# Altium PCB 2016_CNC_v2.PcbDoc
Units mil, origin at the board's own origin, x right, y up, seen from the top; angles counter-clockwise.
Board outline 3952 x 3079 mil, 4 copper layers (1-TOP, 2-SIGNAL, 3-GND, 4-BOT), stack 68 mil thick; 77 components, 67 nets, 325 pads, 72 vias.
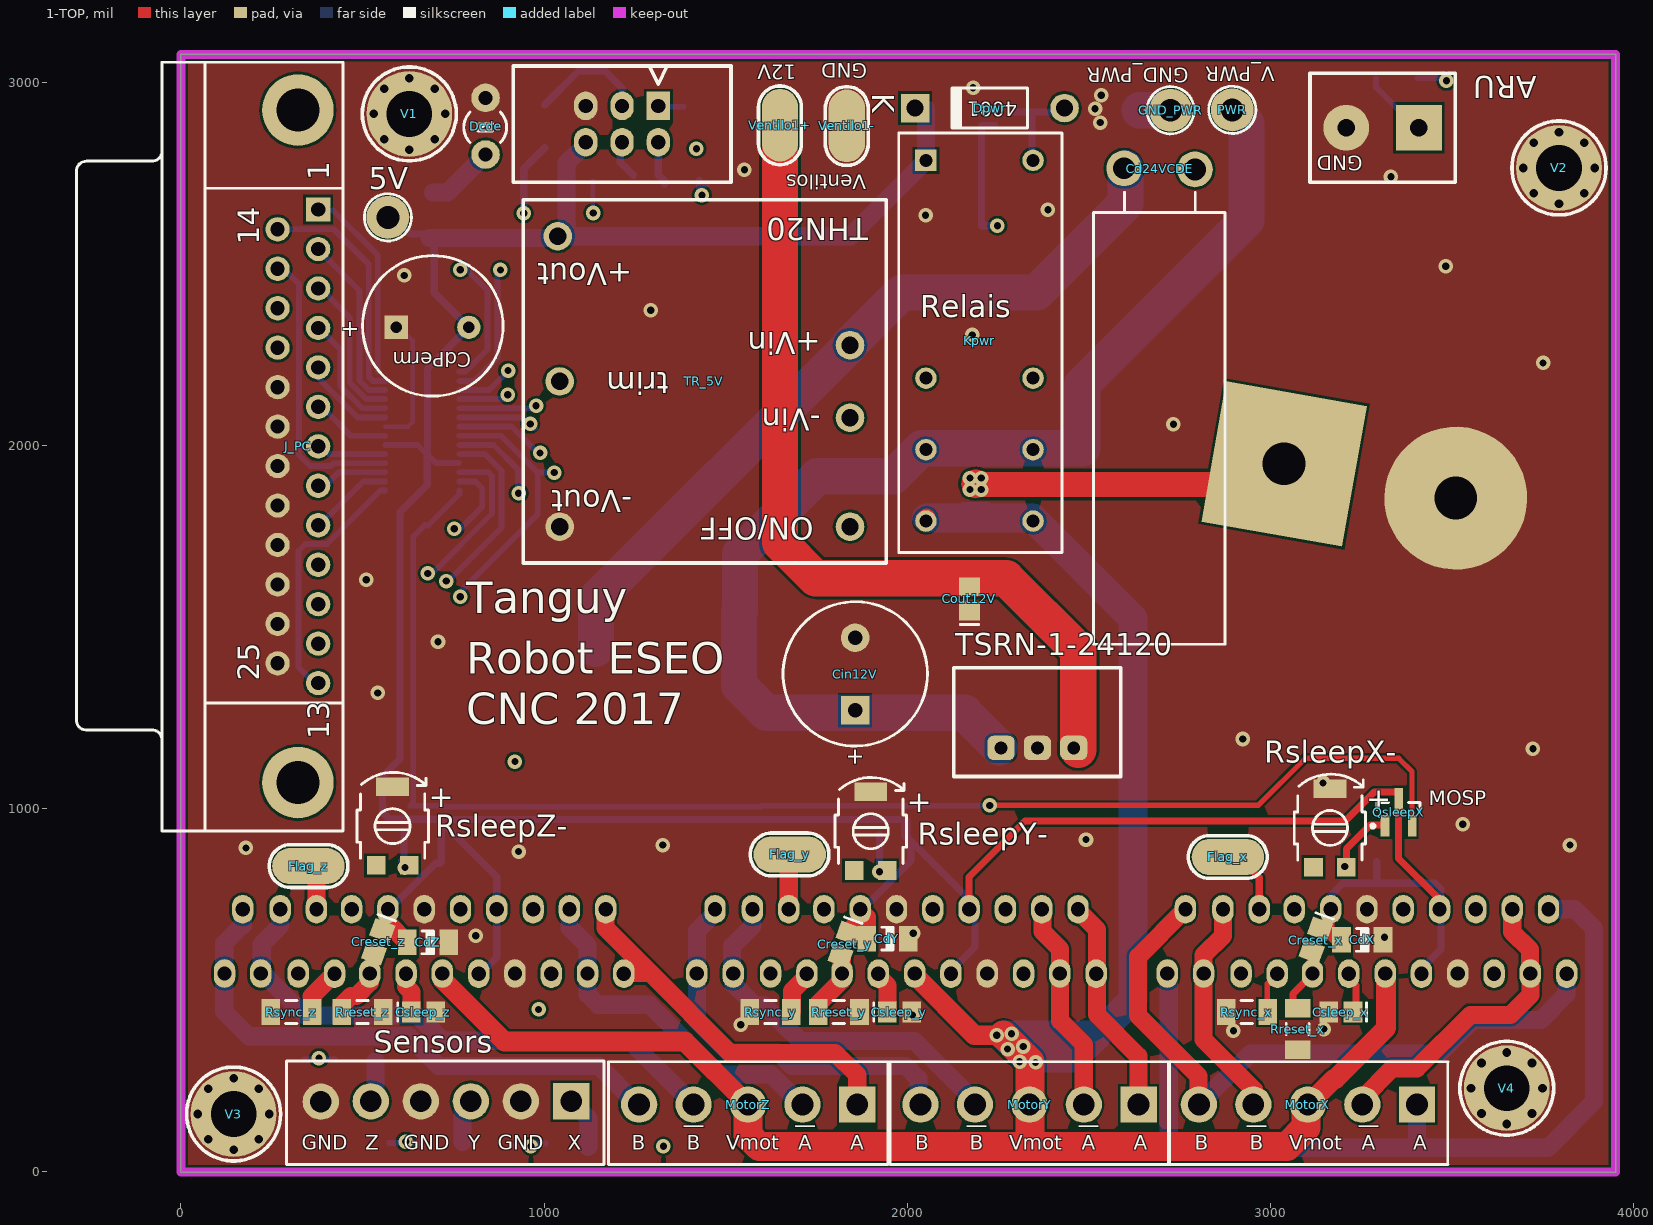
[diagram p0: 1-TOP view]
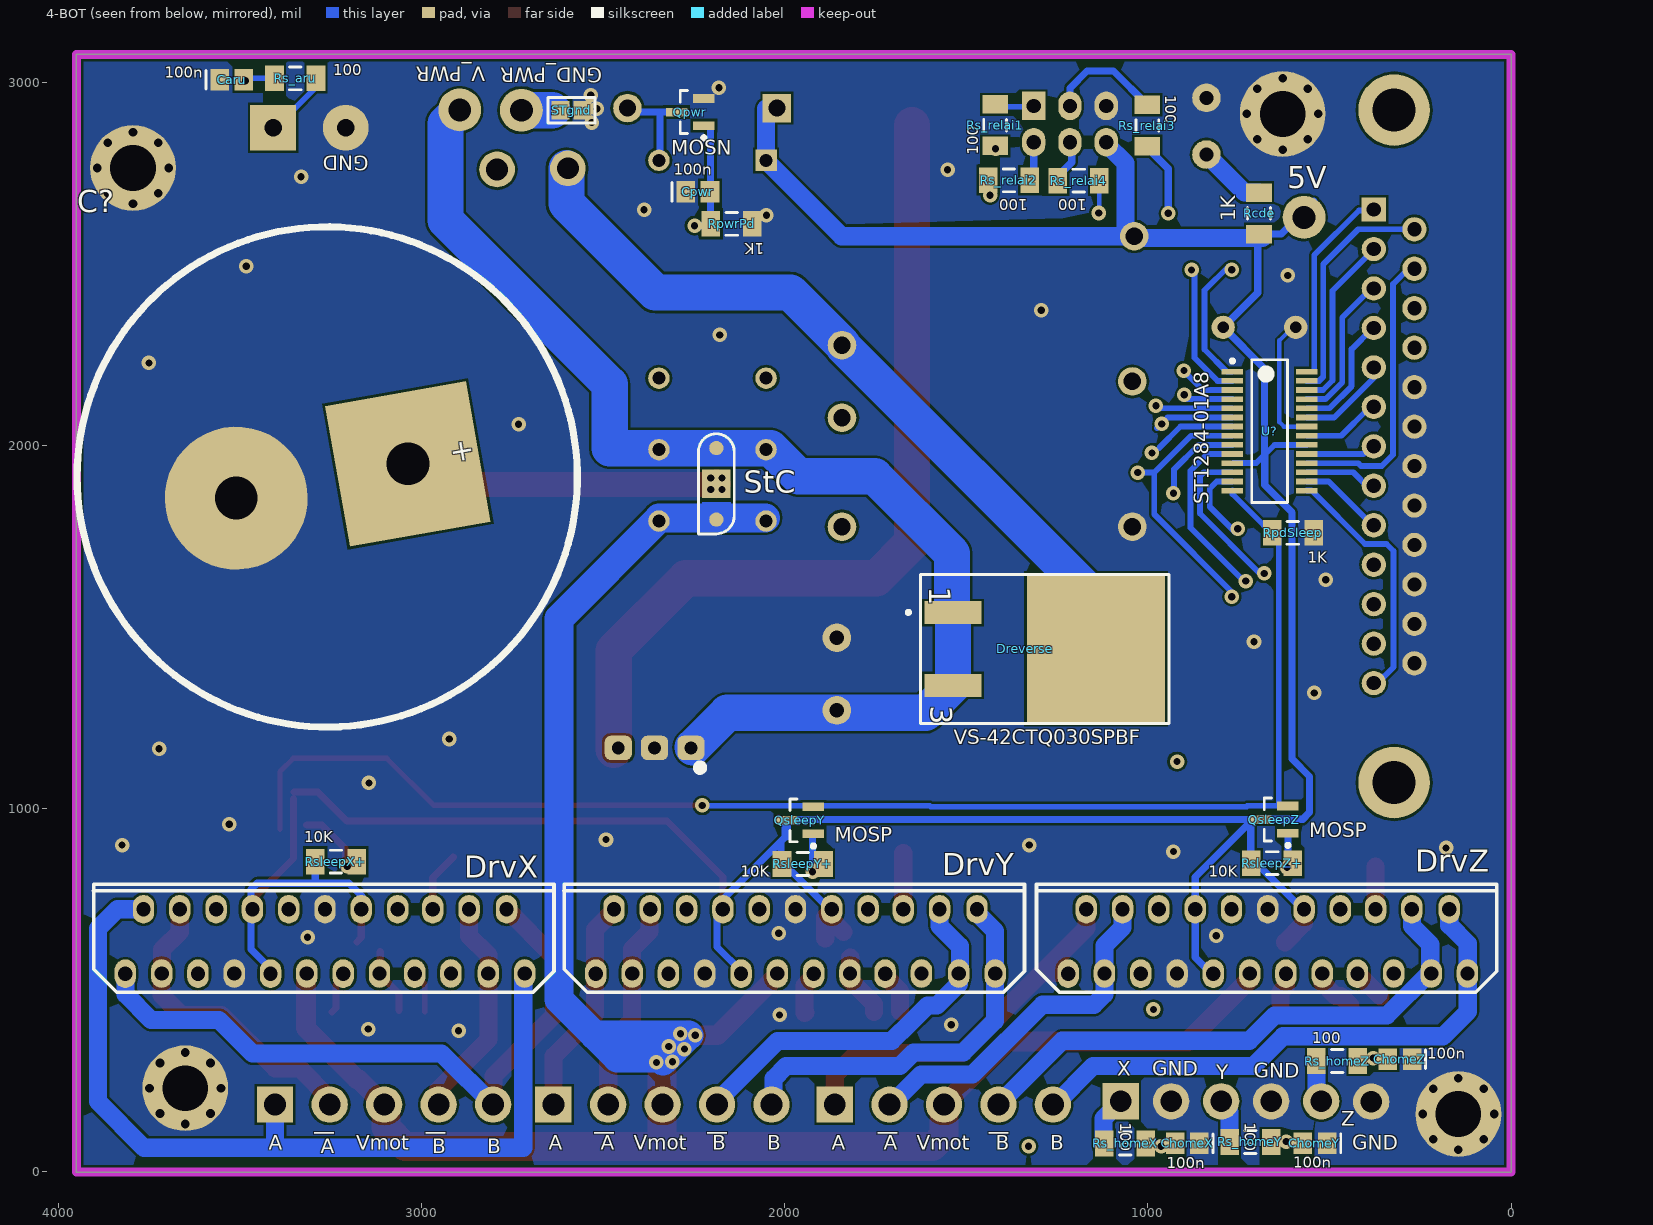
[diagram p1: 4-BOT view, seen from below]
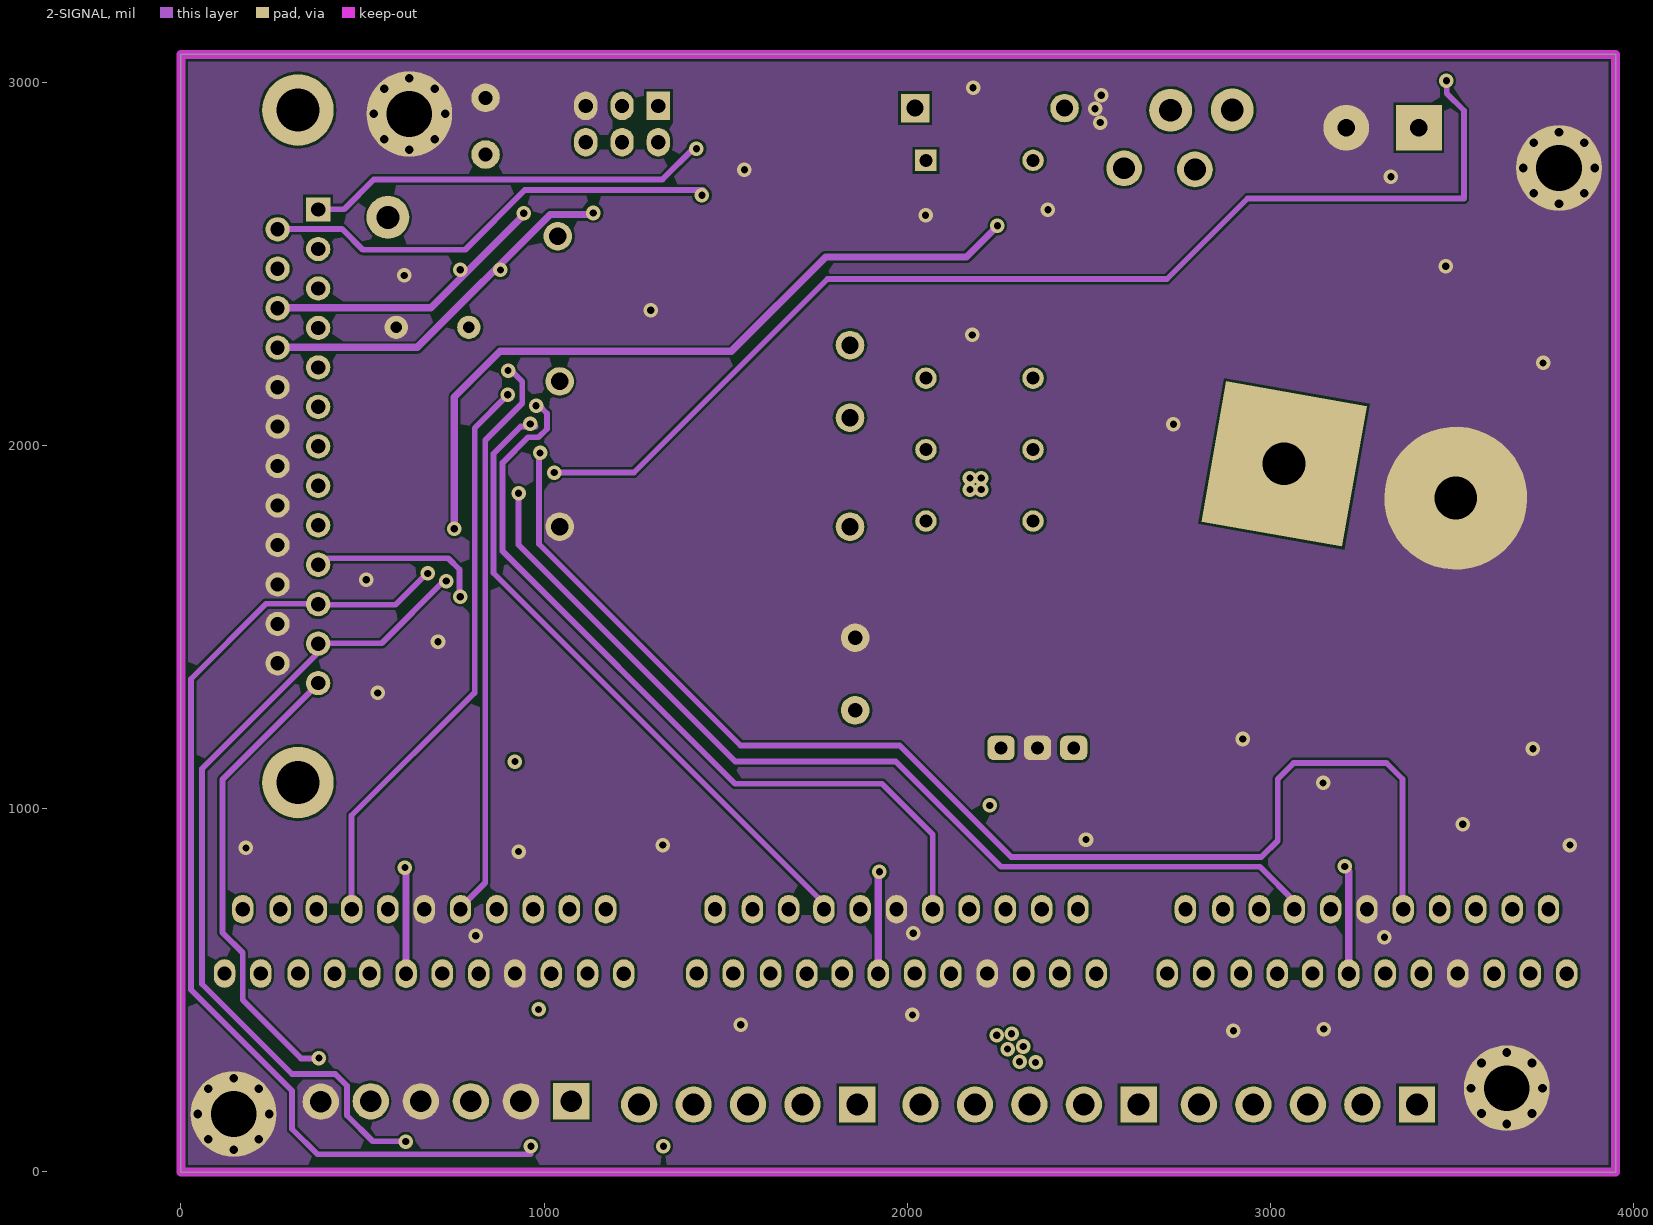
[diagram p2: 2-SIGNAL]
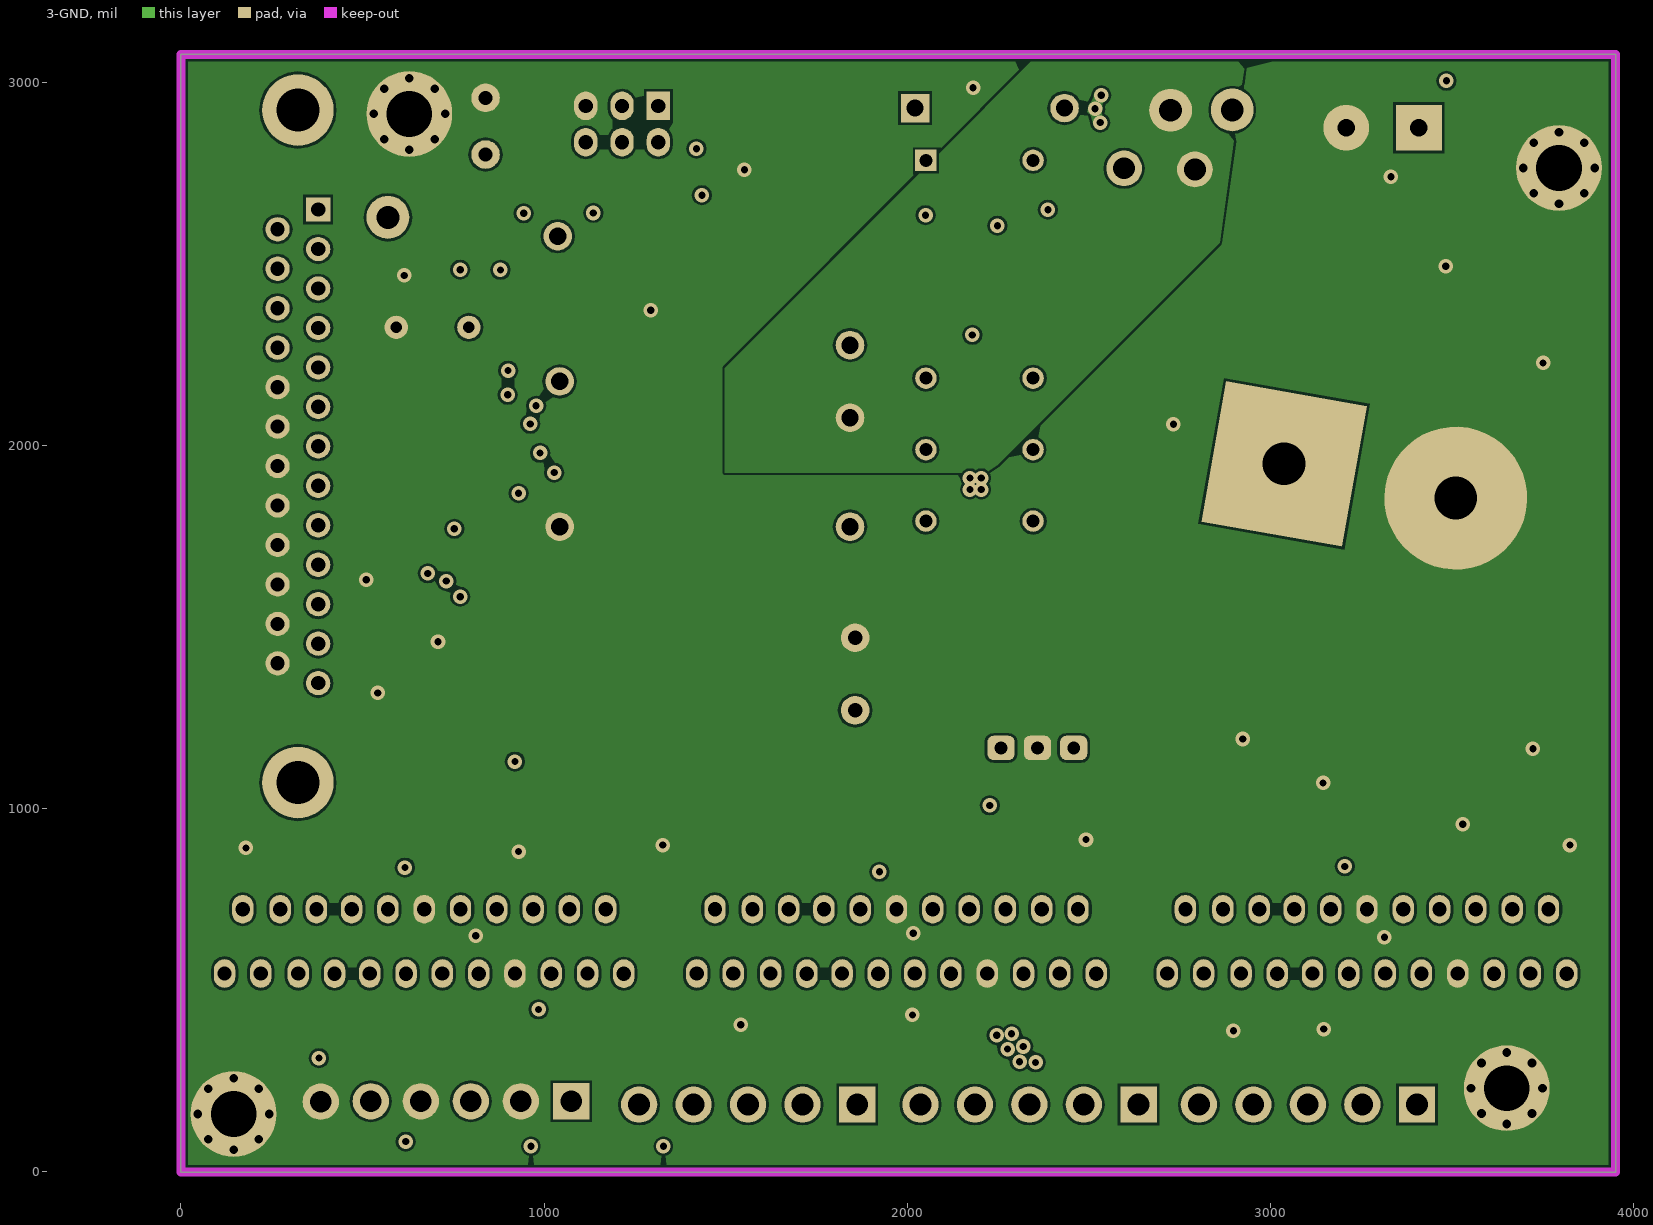
[diagram p3: 3-GND]
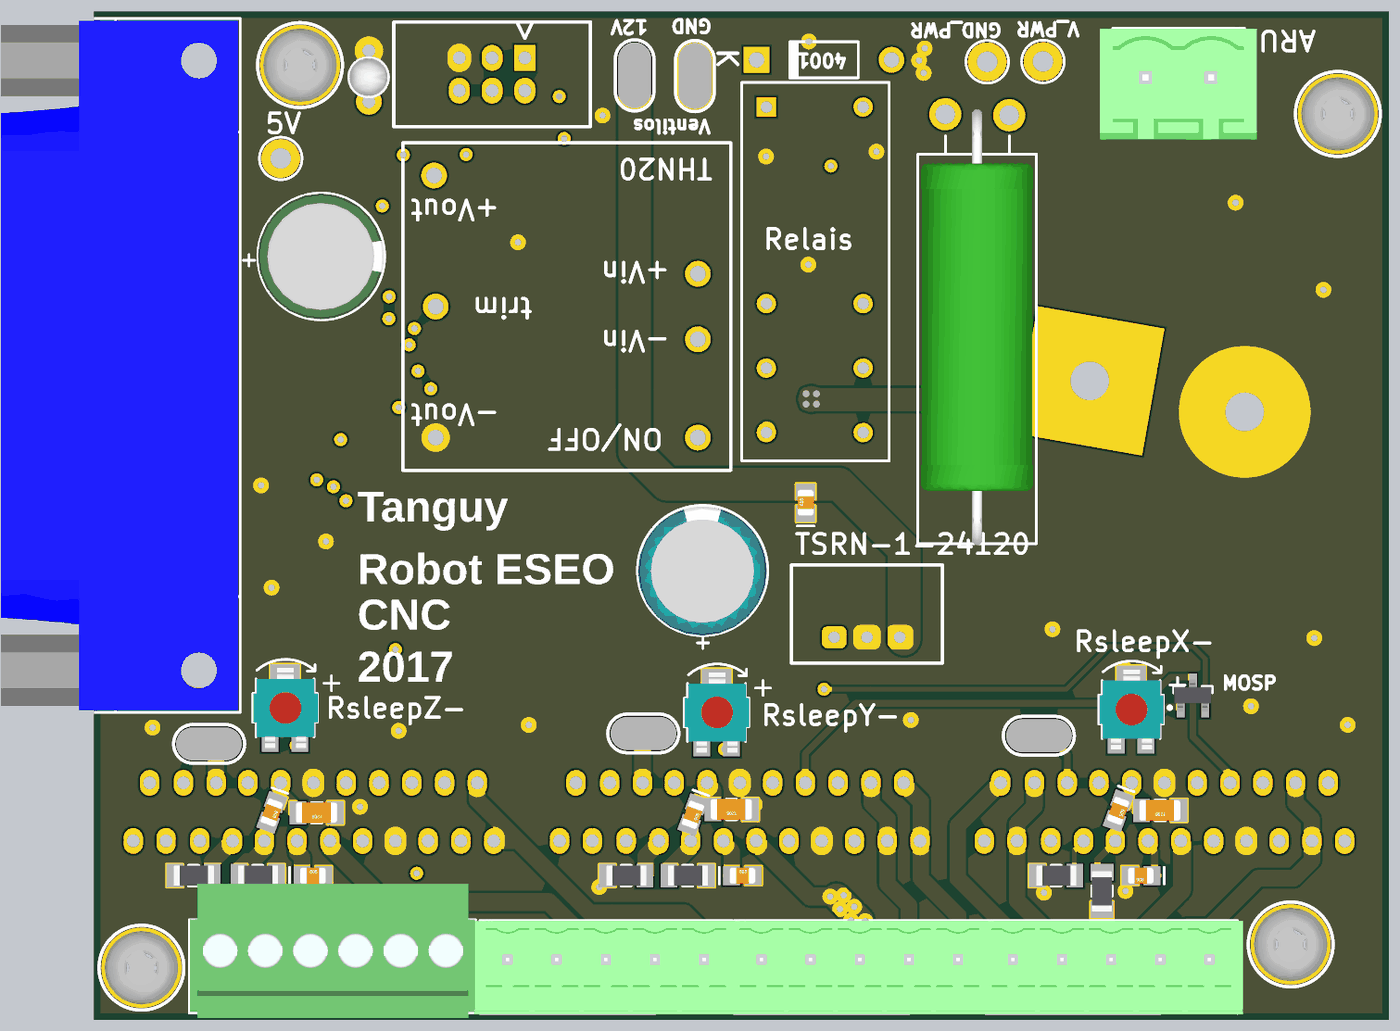
[diagram p4: 3D render of the assembled board from above, using the file's embedded part models]
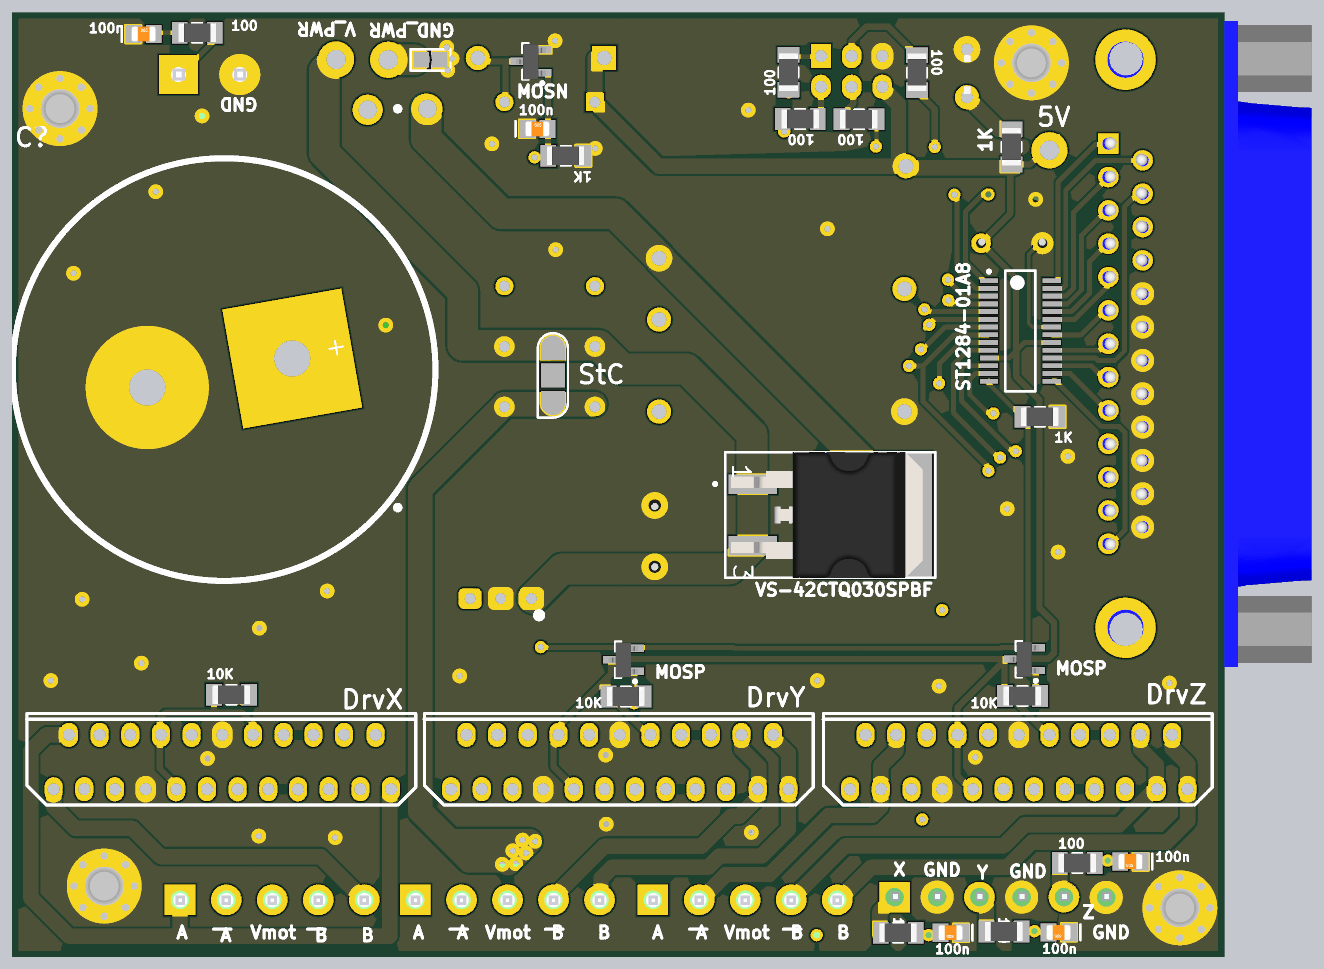
[diagram p5: 3D render of the assembled board from below, using the file's embedded part models]

## Layer stack, top to bottom
Top Solder: solder mask 0.4, Solder Resist, Dk 3.5
1-TOP: signal copper 1.4
Dielectric1: core 20.8, FR-4, Dk 4.8
2-SIGNAL: signal copper 1.4
Dielectric2: prepreg 20.8, FR-4, Dk 4.8
3-GND: signal copper 1.4
Dielectric3: core 20.8, FR-4, Dk 4.8
4-BOT: signal copper 1.4
Bottom Solder: solder mask 0.4, Solder Resist, Dk 3.5

## Board outline
0,-1 0,3078 3952,3078 3952,-1

## Design rules (kind name [scope] priority, off if disabled: settings)
Clearance Clearance_1 [InNamedPolygon('2-GND') Or  InNamedPolygon('3-GND') Or  InNamedPolygon('1-GND') Or  InNamedPolygon('4-GND')] p1: gap=10
Clearance [All] p2: gap=7
FabricationTestpoint [(IsPad And (OnTopLayer Or OnBottomLayer))] p1: side=3 testpointundercomponent=TRUE minsize=40 maxsize=100 preferedsize=60 minholesize=0 maxholesize=40 preferedholesize=32 testpointgrid=1 allowsidetop=TRUE allowsidebottom=TRUE usegrid=TRUE gridtolerance=0.01
HoleSize [All] p1: absolutevalues=TRUE maxlimit=200 minlimit=1 maxpercent=80.000 minpercent=20.000
PlaneConnect [All] p1: planeconnectstyle=Direct reliefexpansion=20 reliefentries=4 reliefconductorwidth=10 reliefairgap=10
PolygonConnect [All] p1: connectstyle=Direct reliefconductorwidth=10 reliefentries=4 polygonreliefangle="90 Angle" airgapwidth=10
RoomDefinition 2016_CNC_v2 [InComponentClass('2016_CNC_v2')] p1: confinementstyle=ConfineIn formatcopy=TRUE lockcomponents=FALSE outline -7875,-7875 -5875,-7875 -5875,-6875 -7875,-6875
RoutingVias [All] p1: holewidth=28 width=50 viastyle="Through Hole" minholewidth=28 minwidth=50 maxholewidth=28 maxwidth=50
SilkToSolderMaskClearance SilkscreenOverComponentPads [IsPad] p1: minsilkscreentomaskgap=10 clearancetoexposedcopper=TRUE
SolderMaskExpansion [All] p1: expansion=4
Width [All] p1: maxlimit=300 minlimit=10 preferedwidth=20
25 further rules are at their usual default settings.

## Components (designator, comment, footprint, x,y, rotation, side; value= is the part's Value field where it differs from the comment)
5V "Name" "Point Test_D3_P1.6mm" 570,2629 r270 top
ARU "BORNIER2" BORNIER2 3210,2876 r0 top
C? "22000uF/ 50V" CAPPR7.5-18X40 3261,1914 r350 bottom
Caru "100n" C0805_N 3524,3008 r180 bottom
Cd24VCDE "1000uF" RESISTANCE_5W 2699,2768 r270 top
CdPerm "100uF" CONDENSATEUR_POLARISE_ELECTROLYTIQUE_RADIAL_5.08/8.9 593,2326 r0 top
CdX "10µ / 25V" C1206_N 3254,639 r180 top
CdY "10µ / 25V" C1206_N 1946,642 r180 top
CdZ "10µ / 25V" C1206_N 680,632 r180 top
ChomeX "100n" C0805_N 892,78 r0 bottom
ChomeY "100n" C0805_N 540,79 r0 bottom
ChomeZ "100n" C0805_N 306,310 r0 bottom
Cin12V "47µ / 63V" CONDENSATEUR_POLARISE_ELECTROLYTIQUE_RADIAL_5.08/10.16 1857,1271 r90 top
Cout12V "10µF/25V" C0805_N 2172,1578 r90 top
Cpwr "100n" C0805_N 2240,2699 r180 bottom
Creset_x "10n" C0805_N 3126,638 r250 top
Creset_y "10n" C0805_N 1828,626 r250 top
Creset_z "10n" C0805_N 543,633 r250 top
Csleep_x "CMS_0805" C0805_N 3195,440 r180 top
Csleep_y "CMS_0805" C0805_N 1979,440 r0 top
Csleep_z "CMS_0805" C0805_N 668,440 r0 top
Dcde "LED" LED_3mm 838,2877 r0 top
Dpwr "Diode 1N4001" DO-41 2228,2930 r180 top
Dreverse "VS-42CTQ030SPBF" "D2Pak (123)" 1537,1540 r270 bottom
DrvX "SLA7078" SLA23 3817,545.98 r180 bottom
DrvY "SLA7078" SLA23 2521,545.98 r180 bottom
DrvZ "SLA7078" SLA23 1220,545.98 r180 bottom
Flag_x "Pad_CMS" PAD_CMS_5.08x2.54 2884,867 r180 top
Flag_y "Pad_CMS" PAD_CMS_5.08x2.54 1677,874 r180 top
Flag_z "Pad_CMS" PAD_CMS_5.08x2.54 351,842 r0 top
GND_PWR "Name" "Point Test_D3_P1.6mm" 2726,2924 r0 top
J_PC "SUBD25_MALE_COUDE" SUBD25_M_C 322,1072 r90 top
Kpwr "Relay-SPST_2pins_par_sorties" RELAY_TECONNECTIVITY 2052,2786 r270 top
MotorX "BORNIER_5V_3.81MM" BORNIER_5V_3.81MM 3404,185 r180 top
MotorY "BORNIER_5V_3.81MM" BORNIER_5V_3.81MM 2637,185 r180 top
MotorZ "BORNIER_5V_3.81MM" BORNIER_5V_3.81MM 1862,185 r180 top
PWR "Name" "Point Test_D3_P1.6mm" 2896,2925 r270 top
Qpwr "MOSN" SOT23-3N 2261,2919 r0 bottom
QsleepX "MOSP" SOT23-3N 3354,990 r90 top
QsleepY "MOSP" SOT23-3N 1959,968 r0 bottom
QsleepZ "MOSP" SOT23-3N 652,970 r0 bottom
Rcde "1k" R1206_N 694,2640 r90 bottom
Relais "BARRETTE_6 CONTACTS_1 RANGEE_MALE_DROITE" "HE10/6_MAL_DROIT_BAS PROFIL" 1315,2836 r180 top
RpdSleep "RESISTANCE_CMS_1206" R1206_N 601,1760 r0 bottom
RpwrPd "RESISTANCE_CMS_1206" R1206_N 2147,2611 r0 bottom
Rreset_x "RESISTANCE_CMS_1206" R1206_N 3076,393 r270 top
Rreset_y "RESISTANCE_CMS_1206" R1206_N 1812,440 r0 top
Rreset_z "RESISTANCE_CMS_1206" R1206_N 500,440 r0 top
Rs_aru "RESISTANCE_CMS_1206" R1206_N 3349,3012 r180 bottom
Rs_homeX "RESISTANCE_CMS_1206" R1206_N 1063,78 r0 bottom
Rs_homeY "RESISTANCE_CMS_1206" R1206_N 718,82 r0 bottom
Rs_homeZ "RESISTANCE_CMS_1206" R1206_N 479,305 r0 bottom
Rs_relai1 "RESISTANCE_CMS_1206" R1206_N 1421,2883 r90 bottom
Rs_relai2 "RESISTANCE_CMS_1206" R1206_N 1383,2731 r180 bottom
Rs_relai3 "RESISTANCE_CMS_1206" R1206_N 1002,2882 r90 bottom
Rs_relai4 "RESISTANCE_CMS_1206" R1206_N 1191,2730 r0 bottom
RsleepX+ "RESISTANCE_CMS_1206" R1206_N 3237,854 r0 bottom
RsleepX- "1k" "POT_3150W_CMS a modifier" 3165,947 r0 top
RsleepY+ "RESISTANCE_CMS_1206" R1206_N 1951,848 r0 bottom
RsleepY- "1k" "POT_3150W_CMS a modifier" 1900,938 r0 top
RsleepZ+ "RESISTANCE_CMS_1206" R1206_N 658,850 r0 bottom
RsleepZ- "1k" "POT_3150W_CMS a modifier" 583,952 r0 top
Rsync_x "RESISTANCE_CMS_1206" R1206_N 2936,440 r0 top
Rsync_y "RESISTANCE_CMS_1206" R1206_N 1624,440 r0 top
Rsync_z "RESISTANCE_CMS_1206" R1206_N 304,440 r0 top
Sensors "BORNIER_6V_3.5MM" BORNIER_6V_3.5MM 1074,194 r180 top
StC "Goutte Strap_3" "Goutte Strap_3 PADS" 2189,1895 r90 bottom
STgnd "Goutte Strap_2" "Goutte Strap_2 Pads_Clearance 0.254mm" 2618,2924 r180 bottom
TR_5V "TRACO THN 20-4811Wi" TRACO_THN20 1943,1677 r180 top
TSRN-1-24120 "DC/DC12V/1A" CONVERTISSEUR_DC/DC_TSRN-1 2589,1388 r180 top
U? "ST1284-01A8" QSOP28 665,2040 r180 bottom
V1 "Pad_M3" M3x6mm 629,2914 r270 top
V2 "Pad_M3" M3x6mm 3796,2765 r270 top
V3 "Pad_M3" M3x6mm 145,159 r270 top
V4 "Pad_M3" M3x6mm 3652,230 r270 top
Ventilo1+ "Pad_CMS" PAD_CMS_5.08x2.54 1650,2883 r270 top
Ventilo1- "Pad_CMS" PAD_CMS_5.08x2.54 1834,2881 r270 top

## Footprints (in the part's own frame and the unit in brackets; to place one, negate y for a bottom-side part, rotate by r counter-clockwise, add the part's x,y. Pads: shape width x height; smd on the part's side, far side on the other; paste and mask are expansions set on the pad)
BORNIER2 [mm] "Connector; Header; 2 Position; screw terminal blocks, Pin Spacing=5.08mm"
  rect 3.2x3.2 hole 1.219: 1(5.08,0)
  round 3.2 hole 1.219: 2(0,0)
  silkscreen extent -2.54,-3.81 7.62,3.81, body extent -3.57,-4.8 8.59,3.8, height 12
BORNIER_5V_3.81MM [mil]
  rect 100x100 hole 60: 1(-1,0)
  round 100 hole 60: 2(150,0) 3(300,0) 4(450,0) 5(600,0)
  silkscreen extent -86,-118 684,166, body extent -102,-117 702,168, height 363
BORNIER_6V_3.5MM [mil]
  rect 100x100 hole 60: 1(-1,0)
  round 100 hole 60: 2(137.8,0) 3(275.59,0) 4(413.39,0) 5(551.18,0) 6(688.98,1)
  silkscreen extent -91,-111 783,174, body extent -89,-221 781,188, height 859
C0805_N [mm] "Chip Capacitor, Body 2.0x1.3mm, IPC Medium Density"
  rect 1.3x1.5 smd: 1(-0.85,0) 2(0.85,0)
  silkscreen extent -1.8,-0.65 -1.8,0.65, body extent -0.99,-0.63 1.01,0.63, height 0.8
C1206_N [mm] "Chip Capacitor, Body 3.2x1.6mm, IPC Medium Density"
  rect 1.3x1.8 smd: 1(-1.45,0) 2(1.45,0)
  silkscreen extent -0.4,-0.8 0.4,0.8, body extent -1.57,-0.81 1.63,0.79, height 1.02
CAPPR7.5-18X40 [mm] "Capacitor, Electrolytic, Radial; Body 18 x 40 mm (Dia.xH typ); Pin Spacing 7.5 mm (typ)"
  rect 10x10 hole 3: 1(-5.715,0.076)
  round 10 hole 3: 2(6.528,0.356)
  silkscreen extent -17.5,-17.5 17.5,17.5, body extent -9.01,-9.01 9.01,9.01, height 40
CONDENSATEUR_POLARISE_ELECTROLYTIQUE_RADIAL_5.08/8.9 [mil] "CONDENSATEUR_POLARISE_ELECTROLYTIQUE_RADIAL ; DIAMETRE : 8.9mm ; ESPACEMENT BROCHES : 5.08mm"
  rect 64x64 / inner round 64 / far side round 64 hole 32: 1(0,0)
  round 64 hole 32: 2(200,0)
  silkscreen extent -93,-190 294,197, body extent -93,-188 291,196, height 485
CONDENSATEUR_POLARISE_ELECTROLYTIQUE_RADIAL_5.08/10.16 [mil] "CONDENSATEUR POLARISE ELECTROLYTIQUE RADIAL ; DIAMETRE : 10.16mm ; ESPACEMENT BROCHES : 5.08mm"
  rect 79x79 / inner round 79 / far side round 79 hole 40: 1(0,0)
  round 79 hole 40: 2(200,0)
  silkscreen extent -98,-199 299,198, body extent -98,-197 295,197, height 630
CONVERTISSEUR_DC/DC_TSRN-1 [mm] "CONVERTISSEUR_DC/DC_TSRN-1"
  rrect50% 1.9x1.7 hole 0.9: 1(8.38,5.6) 2(5.84,5.6) 3(3.3,5.6)
  silkscreen extent 0,0 11.7,7.6
"D2Pak (123)" [mm] "D2-PAK; 3 Leads (1 Cropped); Body 15.2 (inc. leads) x 10.9 mm (LxW max)"
  rect 1.61x4 smd: 1(0,0) 3(5.08,0)
  rect 10.49x9.68 smd: 2(2.54,10)
  silkscreen extent -2.67,-3.25 7.75,15.11, body extent -2.66,-1.8 7.74,14.05, height 4.6
DO-41 [mm] "Diode, Axial; Body 5.2 x 2.7 mm (LxDia. max), Lead Dia. 0.86 mm (max)"
  round 2 hole 1.2: 1(-5.23,0)
  rect 2x2 hole 1.2: 2(5.23,0)
  silkscreen extent -2.65,-1.4 2.75,1.4
"Goutte Strap_2 Pads_Clearance 0.254mm" [mil] "Goutte Strap_2 Pads_Clearance 0.254mm"
  rect 50x50 smd mask+7.87: 1(0,0) 2(60,0)
  silkscreen extent -35,-35 95,35
"Goutte Strap_3 PADS" [mm] "3 Pads CMS Goutte Strap"
  round 1 smd: 1(-2.5,0) 3(2.5,0)
  rect 2x2 smd: 2(0,0)
  1-TOP region: 1.289,1 2.289,1 2.672,0.924 2.996,0.707 3.213,0.383 3.289,0 3.289,0 3.213,-0.383 2.996,-0.707 2.672,-0.924 2.289,-1 2.289,-1 1.289,-1
  1-TOP region: -1.286,-1 -2.286,-1 -2.669,-0.924 -2.993,-0.707 -3.21,-0.383 -3.286,0 -3.286,0 -3.21,0.383 -2.993,0.707 -2.669,0.924 -2.286,1 -2.286,1 -1.286,1
  4-BOT region: 0,1 0.383,0.924 0.707,0.707 0.924,0.383 1,0 1,0 0.924,-0.383 0.707,-0.707 0.383,-0.924 0,-1 0,-1 -0.383,-0.924 -0.707,-0.707 -0.924,-0.383 -1,0 -1,0 -0.924,0.383 -0.707,0.707 -0.383,0.924 0,1
  silkscreen extent -3.5,-1.25 3.5,1.25
"HE10/6_MAL_DROIT_BAS PROFIL" [mm] "Connector; HE10; 6 Position; Male; Right Low Profile; Pin Spacing=2.54mm"
  rect 1.63x2 hole 1: 1(0,-2.54)
  oval 1.63x2 hole 1: 2(0,0) 3(2.54,-2.54) 4(2.54,0) 5(5.08,-2.54) 6(5.08,0)
  silkscreen extent -5.08,-5.33 10.16,2.79
LED_3mm [mm] "LED 3mm; 2 Leads"
  round 2 hole 1: 1(0.025,-1.905) 2(0.025,2.057)
  silkscreen extent -1.5,-1.06 1.5,1.06, body extent -1.64,-1.65 1.65,1.65, height 5.51
M3x6mm [mm] "Vis M3 X 6mm _TORX_Tête 6mm"
  round 0.8 hole 0.6: 1(-2.5,0) 1(-1.768,1.768) 1(-1.768,-1.768) 1(0,2.5) 1(0,-2.5) 1(1.768,1.768) 1(1.768,-1.768) 1(2.5,0)
  round 6 hole 3.2: 1(0,0)
  silkscreen extent -3.28,-3.29 3.28,3.29, body extent -2.84,-2.85 2.86,2.85, height 1.67
PAD_CMS_5.08x2.54 [mil] "Pad pour souder un fil"
  oval 200x100 smd paste+0.2: 1(0,0)
  silkscreen extent -108,-59 109,59, body extent -85,-30 84,30, height 10
"Point Test_D3_P1.6mm" [mm] "Test point for PCB_Hole 1.6mm"
  round 3 hole 1.6: 1(0,0)
  silkscreen extent -1.65,-1.65 1.65,1.65
"POT_3150W_CMS a modifier" [mm] "Trimmer CMS 3150W Tyco"
  rect 1.3x1.3 smd: 1(-1.15,-2.75) 3(1.15,-2.75)
  rect 2.3x1.3 smd: 2(0,2.75)
  silkscreen extent -2.5,-2.25 2.5,3.76, body extent -2.46,-3.1 2.54,3.1, height 2.55
QSOP28 [mm] "SOP, 28-Leads, Body 9,89x3,89mm, Pitch 0,64mm, IPC Medium Density"
  rect 1.5x0.4 smd: 1(-2.6,4.16) 2(-2.6,3.52) 3(-2.6,2.88) 4(-2.6,2.24) 5(-2.6,1.6) 6(-2.6,0.96) 7(-2.6,0.32) 8(-2.6,-0.32) 9(-2.6,-0.96) 10(-2.6,-1.6) 11(-2.6,-2.24) 12(-2.6,-2.88) 13(-2.6,-3.52) 14(-2.6,-4.16) 15(2.6,-4.16) 16(2.6,-3.52) 17(2.6,-2.88) 18(2.6,-2.24) 19(2.6,-1.6) 20(2.6,-0.96) 21(2.6,-0.32) 22(2.6,0.32) 23(2.6,0.96) 24(2.6,1.6) 25(2.6,2.24) 26(2.6,2.88) 27(2.6,3.52) 28(2.6,4.16)
  silkscreen extent -2.73,-5 1.25,5.03, body extent -2,-5 2,5, height 1.75
R1206_N [mm] "Chip Resistor, Body 3.2x1.6mm, IPC Medium Density"
  rect 1.3x1.8 smd: 1(-1.45,0) 2(1.45,0)
  silkscreen extent -0.4,-0.8 0.4,0.8, body extent -1.68,-0.87 1.68,0.87, height 0.71
RELAY_TECONNECTIVITY [mm] "OZ-SS-105LM1,200"
  rect 1.5x1.5 hole 0.9: 1(0,0)
  round 1.5 hole 0.9: 2(15.24,0) 3(20.24,0) 4(25.24,0) 5(25.24,7.5) 6(20.24,7.5) 7(15.24,7.5) 8(0,7.5)
  silkscreen extent -1.91,-1.91 27.43,9.53
RESISTANCE_5W [mil] "RESISTANCE 5W ; DIAMETRE : 8.5mm ; LONGUEUR : 26mm ; PAS : 2mm"
  round 98.43 hole 60: 1(7,94) 2(4,-101)
  silkscreen extent 70,-185 1315,177, body extent -12,-175 1320,167, height 368
SLA23 [mm]
  oval 1.5x2 hole 1: 1(0,-0.01) 2(1.27,4.5) 3(2.54,0) 4(3.81,4.5) 5(5.08,-0.01) 6(6.35,4.5) 7(7.62,0) 8(8.89,4.5) 9(10.16,-0.01) 10(11.43,4.5) 11(12.7,0) 12(13.97,4.5) 13(15.24,-0.01) 14(16.51,4.5) 15(17.78,0) 16(19.05,4.5) 17(20.24,-0.01) 18(21.51,4.5) 19(22.78,0) 20(24.05,4.5) 21(25.4,0) 22(26.67,4.5) 23(27.94,0)
  silkscreen extent -2.24,-1.31 29.99,6.25
SOT23-3N [mm] "SOT23, 3-Leads, Body 2.9x1.3mm, Pitch 0.95mm, Lead Span 2.5mm, IPC Medium Density"
  rect 1.5x0.6 smd: 1(-0.95,0.95) 2(-0.95,-0.95) 3(0.95,0)
  silkscreen extent -1.07,-1.5 0.7,1.92, body extent -1.24,-1.5 1.23,1.5, height 1.1
SUBD25_M_C [mm] "SUBD ; 25 CONTACTS ; MALE ; COUDE ; PAS = 2.77 mm / 2.8 mm"
  rect 1.7x1.7 hole 1: 1(40.092,-1.42)
  round 1.7 hole 1: 2(37.331,-1.42) 3(34.57,-1.42) 4(31.809,-1.42) 5(29.048,-1.42) 6(26.287,-1.42) 7(23.526,-1.42) 8(20.765,-1.42) 9(18.004,-1.42) 10(15.243,-1.42) 11(12.482,-1.42) 12(9.721,-1.42) 13(6.96,-1.42) 14(38.711,1.42) 15(35.95,1.42) 16(33.189,1.42) 17(30.428,1.42) 18(27.667,1.42) 19(24.906,1.42) 20(22.145,1.42) 21(19.384,1.42) 22(16.623,1.42) 23(13.862,1.42) 24(11.101,1.42) 25(8.34,1.42)
  round 5 hole 3: FIX1(0,0) FIX2(47.052,0)
  silkscreen extent -3.39,-3.16 50.4,15.5, body extent -3.23,-3 50.23,15.4, height 12.7
TRACO_THN20 [mm] "THN20"
  round 2 hole 1.219: 1(2.54,-15.24) 2(2.54,-10.16) 3(22.987,-22.86) 4(22.86,-12.7) 5(22.86,-2.54) 6(2.54,-2.54)
  silkscreen extent 0,-25.4 25.4,0, body extent -0.06,-25.43 25.41,0, height 9.91

## Part data
5V GND_PWR PWR: library part "Point Test", "Point test"
ARU: "Terminal blocks, 2 pins, pitch=5mm"
C?: library part "Capacitor  Pol_Radial", "Polarized Capacitor"
Caru CdX CdY CdZ ChomeX ChomeY ChomeZ Cpwr Creset_x Creset_y Creset_z Csleep_x Csleep_y Csleep_z: library part CONDENSATEUR_CMS_CER_0805, "CONDENSATEUR CMS CERAMIQUE 0805"
Cd24VCDE CdPerm: library part "Condensateur Polarise Traversant", "Polarized Capacitor"
Cin12V: library part CONDENSATEUR_POL_ELECTROLY_RAD_5.08/10.16, "CONDENSATEUR POLARISE ELECTROLYTIQUE RADIAL 5.08/10.16"
Cout12V: library part Condensateur, "Capacitor"
Dcde: "Typical LED"
Dpwr: "1 Amp General Purpose Rectifier"
Dreverse: library part "Diode Shottky double BAT54C", "DIODE SCHOTTKY DOUBLE"
Flag_x Flag_y Flag_z Ventilo1+ Ventilo1-: "Pad pour souder un fil"
J_PC: "CONNECTEUR SUBD25 MALE COUDE"
Kpwr: "OZ-SS-105LM1,200 - Single-Pole Single-Throw Relay"
Qpwr: library part "Transistor MOSFET-N", "N-Channel MOSFET"
QsleepX QsleepY QsleepZ: library part "Transistor MOSFET-P", "P-Channel MOSFET"
Rcde: library part Resistor, "Resistor"
Relais: "BARRETTE 6 CONTACTS 1 RANGEE MALE DROITE"
RpdSleep RpwrPd Rreset_x Rreset_y Rreset_z Rs_aru Rs_homeX Rs_homeY Rs_homeZ Rs_relai1 Rs_relai2 Rs_relai3 Rs_relai4 RsleepX+ RsleepY+ RsleepZ+ Rsync_x Rsync_y Rsync_z: library part RESISTANCE_CMS_0805, "RESISTANCE CMS 1206"
RsleepX- RsleepY- RsleepZ-: library part "Resistor Ajustable", "Resistor Ajustable"
TR_5V: "Traco 20W 24V to 5V*4A"
TSRN-1-24120: library part CONVERTISSEUR_DC/DC_TSRN-1, "CONVERTISSEUR_DC/DC_TSRN-1-24120"
U?: "Parallel port single termination network with ±15 kV ESD protection"
V1 V2 V3 V4: library part "Vis M3 X 6mm _TORX_Tête 6mm", "Vis M3 X 6mm _TORX_Tête 6mm"

## Via types
v1: diameter 40, hole 20, 1-TOP to 4-BOT, 68 vias
v2: diameter 40, hole 20, 1-TOP to 4-BOT, tented both sides, 4 vias

## Nets (pads, with @x,y where several pads share a name; then routed paths per layer and width w, separated by ;. In a path a pad name is that pad's centre, name@x,y a point inside that pad or via, vN(x,y) a via of type N, cw(c..) or ccw(c..) an arc to the next point about the centre after c; other vN are vias at no path point)
5V: 5V.1 CdPerm.2 CdX.2 CdY.2 CdZ.2 Creset_x.1 Creset_y.1 Creset_z.1 Dpwr.2 DrvX.8 DrvX.9 DrvX.14 DrvY.8 DrvY.9 DrvY.14 DrvZ.8 DrvZ.9 DrvZ.14 Kpwr.1 QsleepX.3 QsleepY.3 QsleepZ.3 Rcde.1 Relais.6 RsleepX+.2 RsleepY+.2 RsleepZ+.2 TR_5V.3 U?.11 U?.20 | length 9788
  1-TOP w20: DrvY.8 2171,812 2325,966 3207,966 3287,1046 QsleepX.3@3352,1046 ; DrvX.14 3167,645 CdX.2@3179,633 ; QsleepX.3 3354,863 DrvX.8@3466,751 ; DrvX.8@3466,754 DrvX.8@3466,751 ; DrvX.8 3466,722.15 DrvX.8@3466,751
  1-TOP w50: DrvZ.14@571,683.91 CdZ.2 ; Creset_y.1@1839,660.7 1879.39,701.09 1888.91,701.09 CdY.2
  4-BOT w16: U?.20 651.8,2002.2 678.5,1975.5 701.99,1952.01 U?.11@764.99,1952.01
  4-BOT w20: 5V.1@543,2673 633.09,2582.91 Rcde.1 ; DrvZ.14@573,722 701,850 RsleepZ+.2 ; 678.5,1975.5 678.5,1891.5 603,1816 603,1137 555,1089 555,990 574,971 QsleepZ.3@689.4,971 ; 679,1981 679,2212 CdPerm.2 698,2421 698,2571.63 Rcde.1@698,2582 ; QsleepZ.3 QsleepZ.3@712,970 ; RsleepZ+.2@717,855 QsleepZ.3@717,965 ; DrvZ.9@818,538 870,590 DrvZ.8 870,812 QsleepZ.3@717,965 ; DrvY.14 1877.15,723.15 2011,857 2011,910 ; 1996.4,924.6 2011,910 ; QsleepY.3@1998,970 QsleepZ.3@712,970 ; Dpwr.2@2028,2939 Dpwr.2@2039,2928 ; DrvY.9@2120,552 2187,619 2187,734 2011,910 ; DrvX.14@3165,759 3201,795 3454,795 3471,778 3471,613 DrvX.9@3417,559 ; DrvX.14 DrvX.14@3167,760 ; 3294.09,796.09 RsleepX+.2 ; QsleepZ.3@712,970 QsleepZ.3@717,965
  4-BOT w25: 1996.4,924.6 QsleepY.3
  4-BOT w50: Rcde.1@684.63,2571.63 698,2571.63 1032.63,2571.63 TR_5V.3 TR_5V.3@1048,2577 ; Relais.6 1115,2831.36 1062.32,2778.69 1062.32,2591.32 TR_5V.3@1048,2577 ; Dpwr.2@2028,2928 2039,2928 2052,2928 Kpwr.1 2052,2785 1844,2577 TR_5V.3@1048,2577
12V: Cout12V.2 TSRN-1-24120.3 Ventilo1+.1 | length 2369
  1-TOP w100: Ventilo1+.1 1650,1733 1748,1635 2273,1635 2472,1436 TSRN-1-24120.3@2472,1162
ARU_PC: Caru.2 J_PC.10 Rs_aru.1 U?.8 | length 4461.9
  2-SIGNAL w15: v1@3480.5,2999.5 v1(3486,3005)
  2-SIGNAL w16: J_PC.10@384,1680 394,1690 736,1690 767,1659 v1@767,1585 ; v1(1028,1926) 1248,1926 1781,2459 2716,2459 2938,2681 3534,2681 3534,2923 3487,2970 v1@3487,3004
  4-BOT w15: Rs_aru.1 Caru.2@3492,3012
  4-BOT w16: v1@760,1588 983,1811 983,1926 ; U?.8 881.6,2027.4 983,1926 ; v1(1028,1926) 983,1926
  other v1: 769,1584
CDE_RELAI1: J_PC.1 Rs_relai1.1 U?.28 | length 1621.3
  2-SIGNAL w16: J_PC.1@380.91,2651.43 449.43,2651.43 531,2733 1326,2733 v1@1414,2821
  4-BOT w16: J_PC.1@395,2648 419,2648 542,2525 U?.28@542,2205
  other v1: 1420,2818
CDE_RELAI2: J_PC.14 Rs_relai2.1 U?.27 | length 1953.6
  2-SIGNAL w16: J_PC.14@269.09,2597.07 443.93,2597.07 501,2540 783,2540 947,2704 1438,2704 v1@1439,2703
  4-BOT w16: J_PC.14@279,2595 280,2596 421,2596 517,2500 517,2190 528.42,2178.58 U?.27
  4-BOT w20: v1@1428.09,2687.09 Rs_relai2.1@1428.09,2731 ; Rs_relai2.1@1437.85,2721 Rs_relai2.1@1447.09,2721
  other v1: 1435,2690
CDE_RELAI3: J_PC.16 Rs_relai3.1 U?.1 | length 1344
  2-SIGNAL w20: J_PC.16@269.09,2379.67 688.67,2379.67 v1@944.5,2635.5
  4-BOT w16: U?.1 782.78,2203.78 844,2265 844,2428 v1@778.5,2493.5
  4-BOT w20: v1(944,2640) 944,2763 Rs_relai3.1@1002,2821
  other v1: 769,2485
CDE_RELAI4: J_PC.17 Rs_relai4.1 U?.2 | length 1489
  2-SIGNAL w20: J_PC.17@269.09,2270.97 650.97,2270.97 1017,2637 v1@1136,2637
  4-BOT w12: v1@1133.91,2634.09 Rs_relai4.1
  4-BOT w16: U?.2 808.58,2178.58 872,2242 872,2480 v1@868,2484
  other v1: 880,2484 1136,2641
CLKX_INPUT: J_PC.6 U?.21 | length 216.1
  4-BOT w16: J_PC.6@394,2118 394,2101 467.6,2027.4 U?.21
CLKX_OUTPUT: DrvX.10 U?.7 | length 3803.1
  2-SIGNAL w16: v1@986,1982 986,1729 1541,1174 1980,1174 2287,867 2976,867 3021,912 3021,1082 3065,1126 3321,1126 3365,1082 DrvX.10@3365,719
  4-BOT w16: U?.7 910.4,2052.6 969,1994
  other v1: 989,1980
CLKY_INPUT: J_PC.4 U?.24 | length 334.5
  4-BOT w16: J_PC.4@382,2326 382,2323 439,2266 439,2164 500.01,2102.99 U?.24
CLKY_OUTPUT: DrvY.10 U?.5 | length 2411.9
  2-SIGNAL w16: v1(978,2110) 987,2110 1008,2089 1008,2046 985,2023 956,2023 886,1953 886,1709 1526,1069 1931,1069 2071,929 DrvY.10 DrvY.10@2071,719
  4-BOT w16: U?.5 v1@974.99,2102.99
CLKZ_INPUT: J_PC.2 U?.26 | length 485.9
  4-BOT w16: J_PC.2@381,2538 492,2427 492,2179.53 518.14,2153.39 U?.26
CLKZ_OUTPUT: DrvZ.10 U?.3 | length 1714.5
  2-SIGNAL w16: DrvZ.10@776,734 838,796 838,2015 940,2117 940,2177 910,2207 v1(901,2207)
  4-BOT w16: U?.3 849.39,2153.39 v1@899,2203
DIRX_INPUT: J_PC.7 U?.19 | length 177.8
  4-BOT w16: J_PC.7@391,1992 405.99,1977.01 U?.19
DIRX_OUTPUT: DrvX.16 U?.9 | length 2940.9
  2-SIGNAL w16: v1(930,1869) 930,1727 1527,1130 1969,1130 2259,840 2972,840 DrvX.16@3071,741
  4-BOT w16: U?.9 860.8,2002.2 928,1935 v1@928,1874
DIRY_INPUT: J_PC.5 U?.23 | length 250.3
  4-BOT w16: J_PC.5@377,2207 377,2188 487.2,2077.8 U?.23
DIRY_OUTPUT: DrvY.16 U?.6 | length 1993.2
  2-SIGNAL w16: v1@977,2053 936,2053 861,1978 861,1649 1770,740 DrvY.16@1770,728
  4-BOT w16: U?.6 946.2,2077.8 v1@975,2049
  other v1: 962,2060
DIRZ_INPUT: J_PC.3 U?.25 | length 408.8
  4-BOT w16: J_PC.3@385,2433 465,2353 465,2174 510.81,2128.19 U?.25
DIRZ_OUTPUT: DrvZ.16 U?.4 | length 1728.4
  2-SIGNAL w16: DrvZ.16 470,981 808,1319 ; 809,1319 809,2049 v1(900,2140)
  4-BOT w16: U?.4 v1@901.19,2128.19
DRIVER_SLEEP: QsleepX.2 QsleepY.2 QsleepZ.2 RpdSleep.2 U?.14 | length 3909.8
  1-TOP w15: v1(2228,1009) 2967,1009 3097,1139 3354,1139 3391,1102 QsleepX.2@3391,944
  4-BOT w15: RpdSleep.2@672.09,1782 640,1749.91 640,1017 631,1008 726,1008 728,1006 1599,1006 1601,1008 v1@2226,1008 ; RpdSleep.2@681,1780 767.36,1866.36
  4-BOT w16: 767.36,1866.36 U?.14
DRIVER_SLEEP_PC: J_PC.9 U?.16 | length 216.4
  4-BOT w16: J_PC.9@392,1791 502.42,1901.42 U?.16
GND: ARU.2 C?.2 Caru.1 CdPerm.1 CdX.1 CdY.1 CdZ.1 ChomeX.1 ChomeY.1 ChomeZ.1 Cin12V.2 Cout12V.1 Cpwr.1 Csleep_x.2 Csleep_y.2 Csleep_z.2 Dcde.2 DrvX.7 DrvX.12 DrvY.7 DrvY.12 DrvZ.7 DrvZ.12 J_PC.18 J_PC.19 J_PC.20 J_PC.21 J_PC.22 J_PC.23 J_PC.24 J_PC.25 Qpwr.2 Relais.5 RpdSleep.1 RpwrPd.1 Rreset_x.2 Rreset_y.2 Rreset_z.2 RsleepX-.2 RsleepY-.2 RsleepZ-.2 Rsync_x.1 Rsync_y.1 Rsync_z.1 Sensors.2 Sensors.4 Sensors.6 STgnd.2 TR_5V.5 TSRN-1-24120.2 U?.22 V1.1 V2.1 V3.1 V4.1 Ventilo1-.1 | length 346.5
  4-BOT w12: U?.22 625.6,2052.6 638,2065 638,2290 CdPerm.1@609,2319
  other v1: 2899,388 3148,393 1542,405 2015,432 3315,646 812,650 2017,657 930,882 179,892 1327,900 3826,900 2493,915 3531,957 3146,1071 3724,1165 2925,1192 542,1319 708,1460 510,1631 2734,2059 3752,2228 2180,2305 1294,2373 615,2469 3484,2494 2051,2635 2388,2650 3333,2741 1552,2760 2532,2890 2518,2928 2535,2965 2182,2986
GND_PWR: Cd24VCDE.1 GND_PWR.1 STgnd.1 TR_5V.2 | length 81
  4-BOT w100: STgnd.1@2641,2924 2711,2924 GND_PWR.1@2722,2924
HOMEX: Rs_homeX.2 Sensors.1 | length 146.7
  4-BOT w50: Sensors.1 1123,146 1123,70 Rs_homeX.2@1121,68
HOMEX_PC: ChomeX.2 J_PC.11 Rs_homeX.1 U?.12 | length 3334.4
  2-SIGNAL w16: J_PC.11@380.91,1564.42 234.42,1564.42 27.5,1357.5 27.5,501.5 306,223 306,118 376,48 963,48 ; J_PC.11@388,1562 591,1562 v1@685.5,1656.5
  4-BOT w16: v1@694,1650 857,1813 857,1916 846.39,1926.61 U?.12 ; ChomeX.2@919,70 927,78 Rs_homeX.1
  other v1: 964,70 680,1648
HOMEY: Rs_homeY.2 Sensors.3 | length 121
  4-BOT w50: Rs_homeY.2 775.09,164.91 Sensors.3@802,191.83
HOMEY_PC: ChomeY.2 J_PC.12 Rs_homeY.1 U?.10 | length 2867.2
  2-SIGNAL w16: J_PC.12@380,1456 553,1456 v1@726,1629 ; J_PC.12@380.91,1455.72 380.91,1432.91 58,1110 58,517 306,269 425,269 457,237 457,155 528,84 v1@619,84
  4-BOT w16: ChomeY.2 659,79 Rs_homeY.1@663,83 ; v1@737.5,1628.5 883,1774 883,1931 836.99,1977.01 U?.10
  other v1: 619,83 731,1627
HOMEZ: Rs_homeZ.2 Sensors.5 | length 108.3
  4-BOT w50: Sensors.5@516,205 536.09,225.09 Rs_homeZ.2
HOMEZ_PC: ChomeZ.2 J_PC.13 Rs_homeZ.1 U?.15 | length 2061.5
  2-SIGNAL w16: v1@380,312 331,312 170,473 170,603 114,659 114,1080.11 J_PC.13@380.91,1347.02
  4-BOT w16: ChomeZ.2 Rs_homeZ.1@424,310 ; J_PC.13@370,1344 324,1390 324,1710 343,1729 402,1729 549.22,1876.22 U?.15
  other v1: 380,313
MOTOR_X_A: DrvX.2 DrvX.23 MotorX.1 | length 2446.6
  4-BOT w50: DrvX.23@2719,547 2721,547 2721,66 3765,66 3892,193 3892,670 3838.85,723.15 DrvX.2 ; 3405,69 MotorX.1
MOTOR_X_A\: DrvX.3 DrvX.4 MotorX.2 | length 867.3
  1-TOP w50: MotorX.2 3254,202 3336,284 3404,284 3552,432 3662,432 3717,487 DrvX.3 3717,547 DrvX.3@3719,545 ; DrvX.4 3667,661 3716,612 DrvX.3@3716,537
MOTOR_X_B: DrvX.1 DrvX.22 MotorX.5 | length 1883.4
  1-TOP w50: DrvX.22 2636,592.15 2636,431 2803,264 MotorX.5@2803,169
  4-BOT w50: DrvX.22 DrvX.22@2768,724.15 ; MotorX.5@2798,178 2946,326 3467,326 3559,418 3746,418 3817,489 DrvX.1
MOTOR_X_B\: DrvX.20 DrvX.21 MotorX.4 | length 618.1
  1-TOP w50: DrvX.20@2870,721 2870,650 2817,597 DrvX.21 2817,364 2955,226 MotorX.4@2955,182
MOTOR_Y_A: DrvY.1 DrvY.2 MotorY.1 | length 610.2
  1-TOP w50: DrvY.2@2472,724 2469,721 2523,667 2523,433 2638,318 MotorY.1
MOTOR_Y_A\: DrvY.3 DrvY.4 MotorY.2 | length 591.2
  1-TOP w50: DrvY.4@2373,729 2373,662 2421,614 DrvY.3 2421,416 2487,350 MotorY.2
MOTOR_Y_B: DrvY.22 DrvY.23 MotorY.5 | length 1089.1
  4-BOT w50: DrvY.22 1471,713 1421,663 DrvY.23 1421,416 1509,328 1646,328 1683,291 1997,291 2032,256 MotorY.5@2032,172
MOTOR_Y_B\: DrvY.20 DrvY.21 MotorY.4 | length 1037.7
  4-BOT w50: DrvY.21@1518,544 1518,621 1574.15,677.15 DrvY.20 ; DrvY.21 1521,518 1581,458 1607,458 1679,386 1680,386 1706,360 2021,360 MotorY.4@2192,189
MOTOR_Z_A: DrvZ.1 DrvZ.2 MotorZ.1 | length 1063.8
  1-TOP w50: DrvZ.2@1169,718 1169,671 1293,547 ; DrvZ.1@1219,547 1293,547 ; MotorZ.1 1863,266 1802,327 1513,327 1293,547
MOTOR_Z_A\: DrvZ.3 DrvZ.4 MotorZ.2 | length 990
  4-BOT w50: DrvZ.4 1070,673 1120,623 DrvZ.3 1120,489 1149,460 1291,460 1483,268 1625,268 MotorZ.2@1723,170
MOTOR_Z_B: DrvZ.22 DrvZ.23 MotorZ.5 | length 1548.1
  4-BOT w50: DrvZ.22 170,679 119,628 119,442 188,373 628,373 710,291 1151,291 MotorZ.5@1258,184
MOTOR_Z_B\: DrvZ.20 DrvZ.21 MotorZ.4 | length 1539.9
  4-BOT w50: DrvZ.20@273,728 273,677 222.28,626.28 222.28,550 342.28,430 651.61,430 720.61,361 1236,361 MotorZ.4
NetARU_1: ARU.1 Rs_aru.2 | length 189.1
  4-BOT w16: Rs_aru.2 3291.91,2987.09 ARU.1@3408,2871
NetC?_1: C?.1 StC.2 | length 872.4
  1-TOP w70: v2@2186,1893 C?.1@2965,1893
  1-TOP w100: C?.1@2965,1903 3012.12,1950.12 C?.1
  other v2: 2173.25,1879.25 2204.75,1879.25 2173.25,1910.75 2204.75,1910.75
NetCd24VCDE_2: Cd24VCDE.2 Dreverse.2 TR_5V.1 | length 2140.3
  4-BOT w100: Dreverse.2 1143.3,1577.3 TR_5V.1@1838,2272 ; TR_5V.1@1840,2277 1985,2422 2357,2422 2602,2667 Cd24VCDE.2@2602,2764
NetDcde_1: Dcde.1 Rcde.2 | length 182.8
  4-BOT w50: Rcde.2 734.09,2697.09 Dcde.1@835,2798
NetDpwr_1: Dpwr.1 Kpwr.8 Qpwr.3 | length 258.8
  4-BOT w20: Qpwr.3 2344,2919 ; Kpwr.8@2347,2785 2344,2788 2344,2919 ; Dpwr.1@2422,2919 2344,2919
NetDrvX_17: DrvX.17 Rsync_x.2 | length 116.3
  1-TOP w15: Rsync_x.2@2992,441 2992,517.44 DrvX.17
NetDrvX_18: DrvX.18 Flag_x.1 | length 166.1
  1-TOP w20: Flag_x.1@2914,866 2970.15,809.85 DrvX.18
NetDrvY_17: DrvY.17 Rsync_y.2 | length 120.6
  1-TOP w50: Rsync_y.2@1683,442 1683,498 1724.15,539.15 DrvY.17
NetDrvY_18: DrvY.18 Flag_y.1 | length 155
  1-TOP w50: DrvY.18 Flag_y.1@1674.15,878.15
NetDrvZ_17: DrvZ.17 Rsync_z.2 | length 89.3
  1-TOP w50: 360,482.44 DrvZ.17
NetDrvZ_18: DrvZ.18 Flag_z.1 | length 117.7
  1-TOP w50: DrvZ.18 Flag_z.1@373.15,840.85
NetRelais_1: Relais.1 Rs_relai1.2 | length 65.9
  4-BOT w15: Relais.1@1319,2934 1384.91,2934
NetRelais_2: Relais.2 Rs_relai2.2 | length 122.4
  4-BOT w20: Relais.2 1315,2746 1332.91,2728.09 Rs_relai2.2@1332.91,2721
NetRelais_3: Relais.3 Rs_relai3.2 | length 320
  4-BOT w20: Rs_relai3.2 1094.91,3032 1168,3032 1215,2985 Relais.3
NetRelais_4: Relais.4 Rs_relai4.2 | length 110.9
  4-BOT w20: Relais.4@1210,2841 1210,2781 Rs_relai4.2@1246,2745
POWER_ENABLE: Cpwr.2 Qpwr.1 RpwrPd.2 U?.13 | length 2629.5
  2-SIGNAL w20: v1(753,1771) 753,2134 879,2260 1516,2260 1776,2520 2164,2520 v1@2248,2604
  4-BOT w16: v1@759.5,1761.5 830,1832 830,1882 810.58,1901.42 U?.13
  4-BOT w20: Qpwr.1@2242,2882 2206,2882 2205,2881 2205,2606 v1(2249,2606)
POWER_ENABLE_PC: J_PC.8 U?.17 | length 186.9
  4-BOT w16: J_PC.8@393,1885 434.61,1926.61 U?.17
READ_5V: J_PC.15 U?.18 | length 790.2
  4-BOT w16: J_PC.15@278,2492 325,2445 325,1975 356,1944 413,1944 420.81,1951.81 U?.18
RESETX: Creset_x.2 DrvX.15 Rreset_x.1 | length 185
  1-TOP w20: Rreset_x.1@3062.91,445 3062.91,489.91 3117,544 3114.55,546.45 Creset_x.2
RESETY: Creset_y.2 DrvY.15 Rreset_y.1 | length 176.3
  1-TOP w50: Rreset_y.1 1754.91,461.91 1820,527 Creset_y.2@1820,589.3
RESETZ: Creset_z.2 DrvZ.15 Rreset_z.1 | length 129.1
  1-TOP w50: Rreset_z.1@442,458 468,484 483,484 520,521 DrvZ.15
SLEEPX: Csleep_x.1 DrvX.13 QsleepX.1 RsleepX+.1 RsleepX-.3 | length 593.2
  1-TOP w20: RsleepX-.3 3210.28,889.28 3276,955 QsleepX.1@3317,955 ; DrvX.13 3217,534 3237,514 3237,451 Csleep_x.1@3248,440
  2-SIGNAL w20: DrvX.13 v1@3217,828
  4-BOT w20: RsleepX+.1@3202,833 v1@3207.6,838.6
  other v1: 3206,841
SLEEPY: Csleep_y.1 DrvY.13 QsleepY.1 RsleepY+.1 RsleepY-.3 | length 507
  1-TOP w50: DrvY.13@1919,545.59 1919,540 1946,513 1946,437 Csleep_y.1@1944,439
  2-SIGNAL w20: DrvY.13 v1@1921,828
  4-BOT w20: v1(1924,826) QsleepY.1@1924,928
SLEEPZ: Csleep_z.1 DrvZ.13 QsleepZ.1 RsleepZ+.1 RsleepZ-.3 | length 479.9
  1-TOP w50: DrvZ.13 620,510 635,495 Csleep_z.1@635,446
  2-SIGNAL w20: DrvZ.13 v1@620,830
  4-BOT w20: QsleepZ.1 614.6,863.6 608,857 RsleepZ+.1@616,849
  other v1: 617,838
V_MOTOR: DrvX.11 DrvY.11 DrvZ.11 Kpwr.4 Kpwr.5 MotorX.3 MotorY.3 MotorZ.3 StC.1 | length 6241.4
  1-TOP w50: Kpwr.4@2049,1797 Kpwr.4@2053.7,1801.3
  1-TOP w55: DrvZ.11@722,543 722,528 891,359 1388,359 MotorZ.3 ; DrvY.11@2019,546 2019,543 2186,376 ; 2187,376 v1@2266,376 ; MotorX.3@3098,178 3176,256 3180,256 3320,396 3320,542.98 DrvX.11
  1-TOP w80: MotorZ.3 1562,100 1593,69 2339,69 ; v1@2266,376 v1@2312,330 ; 2324.5,317.5 2339,303 2339,70 3047,70 3099,122 MotorX.3@3099,176
  4-BOT w80: Kpwr.4@2053.7,1801.3 2347.28,1801.3 2347.28,1798.72 2622,1524 2622,474 2462,314 v1@2355,314 ; v1@2336,305 2265,376 2524,376
  other v1: 2354,301 2310,303 2277,338 2320,345 2247,376 2288,380
V_PWR: Cin12V.1 Dreverse.1 Dreverse.3 Kpwr.3 Kpwr.6 PWR.1 StC.3 TSRN-1-24120.1 | length 3349
  4-BOT w100: Dreverse.1 Dreverse.3 1613,1264 2159,1264 TSRN-1-24120.1@2254,1169 ; Dreverse.1@1540,1543 1540,1703 1753,1916 1963,1916 2040,1993 2479,1993 ; 2483,1993 2483,2169 2935,2621 2935,2887 PWR.1@2892,2930
pads on no net: DrvX.5 DrvX.6 DrvX.19 DrvY.5 DrvY.6 DrvY.19 DrvZ.5 DrvZ.6 DrvZ.19 J_PC.FIX1 J_PC.FIX2 Kpwr.2 Kpwr.7 RsleepX-.1 RsleepY-.1 RsleepZ-.1 TR_5V.4 TR_5V.6
copper on no net:
  other v1: 1329,70 985,447 920,1130

## Polygon pours and split planes (outlines as drawn)
GND on 4-BOT "GND" (solid, pour order 17): 7,3080 3945,3080 3945,3 3952,-4 3946,2 2,2
GND on 1-TOP "GND" (solid, pour order 15): 0,-2 3939,-2 3945,4 3946,5 3946,3073 15,3073 3,3085
GND on 2-SIGNAL "GND" (solid, pour order 13): 0,0 7,7 7,3069 3946,3069 3952,3063 3952,-4
GND on 3-GND "GND" (solid, pour order 11): -2,3077 3948,3077 3949,3076 3951,3074 3951,0 1,0 0,1
GND_PWR on 3-GND "GND_PWR" (solid, pour order 7): 2861,2559 2228,1926 1498,1926 1498,2214 1561,2277 2341,3057 2602,3057 2931,3057

## Keep-outs
Keep-Out Layer:
  the board outline again, w25

## Silkscreen, mask and mechanical layers (free items; w line width, h text height)
Top Overlay:
  text "GND" at 1891,3053 h40 r180
  text "12V" at 1695,3050 h40 r180
  text "V_PWR" at 3013,3044 h40 r180
  text "GND_PWR" at 2776,3041 h40 r180
  text "K" at 1904,2971 h60 r270
  text "4001" at 2304,2948 h40 r180
  text "GND" at 3256,2798 h40 r180
  text "Ventilos" at 1887,2747 h40 r180
  text "Tanguy" at 786,1509 h150
  text "Robot ESEO" at 786,1343 h150
  text "CNC 2017" at 786,1204 h150
  text "MOSP" at 3437,1009 h40
  text "|" at 1426,115 h40 r90
  text "|" at 1734,115 h40 r90
  text "|" at 2206,115 h40 r90
  text "|" at 2514,115 h40 r90
  text "|" at 2977,115 h40 r90
  text "|" at 3285,115 h40 r90
  text "GND" at 332,60 h40
  text "Z" at 508,60 h40
  text "GND" at 613,60 h40
  text "Y" at 791,60 h40
  text "GND" at 873,60 h40
  text "X" at 1066,60 h40
  text "B" at 1242,60 h40
  text "B" at 1393,60 h40
  text "Vmot" at 1502,60 h40
  text "A" at 1701,60 h40
  text "A" at 1844,60 h40
  text "B" at 2022,60 h40
  text "B" at 2173,60 h40
  text "Vmot" at 2282,60 h40
  text "A" at 2481,60 h40
  text "A" at 2624,60 h40
  text "B" at 2793,60 h40
  text "B" at 2944,60 h40
  text "Vmot" at 3053,60 h40
  text "A" at 3252,60 h40
  text "A" at 3395,60 h40
Bottom Overlay:
  text "V_PWR" at 2826,3044 h40 r180
  text "GND_PWR" at 2504,3041 h40 r180
  text "100" at 3244,3021 h30
  text "100n" at 3708,3013 h30
  text "100" at 953,2965 h30 r90
  text "MOSN" at 2313,2802 h40
  text "100" at 1467,2801 h30 r270
  text "GND" at 3146,2799 h40 r180
  text "100n" at 2306,2746 h30
  text "5V" at 617,2709 h60
  text "100" at 1169,2679 h30 r180
  text "100" at 1331,2679 h30 r180
  text "1K" at 760,2618 h40 r270
  text "1K" at 2057,2558 h30 r180
  text "ST1284-01A8" at 832,1838 h40 r270
  text "1K" at 560,1678 h30
  text "VS-42CTQ030SPBF" at 1535,1177 h40
  text "MOSP" at 556,921 h40
  text "MOSP" at 1863,909 h40
  text "10K" at 3324,907 h30
  text "10K" at 2122,813 h30
  text "10K" at 833,812 h30
  text "100" at 548,354 h30
  text "100n" at 231,311 h30
  text "X" at 1085,265 h40
  text "GND" at 988,264 h40
  text "GND" at 708,259 h40
  text "Y" at 812,255 h40
  text "100" at 734,135 h30 r90
  text "100" at 1077,135 h30 r90
  text "Z" at 468,126 h40
  text "|" at 1425,115 h40 r90
  text "|" at 1731,115 h40 r90
  text "|" at 2201,115 h40 r90
  text "|" at 2512,115 h40 r90
  text "|" at 2976,115 h40 r90
  text "|" at 3283,115 h40 r90
  text "GND" at 437,60 h40
  text "B" at 1269,60 h40
  text "B" at 1420,60 h40
  text "Vmot" at 1637,60 h40
  text "A" at 1728,60 h40
  text "A" at 1871,60 h40
  text "B" at 2049,60 h40
  text "B" at 2200,60 h40
  text "Vmot" at 2416,60 h40
  text "A" at 2508,60 h40
  text "A" at 2651,60 h40
  text "Vmot" at 3181,60 h40
  text "A" at 3422,60 h40
  text "B" at 2820,50.98 h40
  text "B" at 2971,50.98 h40
  text "A" at 3279,50.98 h40
  text "100n" at 600,11 h30
  text "100n" at 949,10 h30

## Text inside footprints (layer, text, board x,y; h text height)
C?: Bottom Overlay "+" at 2859.99,2014.69 h59.06 r170
CdPerm: Top Overlay "+" at 440.24,2300.8 h45
Cin12V: Top Overlay "+" at 1876.29,1117.06 h45 r90
Dreverse: Bottom Overlay "3" at 1598,1284 h59.06 r90; Bottom Overlay "1" at 1602,1612 h59.06 r90
J_PC: Top Overlay "14" at 215.7,2553.34 h59.06 r90; Top Overlay "25" at 215.7,1352.55 h59.06 r90; Top Overlay "1" at 408.61,2730.5 h59.06 r90; Top Overlay "13" at 408.61,1191.13 h59.06 r90
RsleepX-: Top Overlay "+" at 3264.61,998.57 h60
RsleepY-: Top Overlay "+" at 1999.61,989.57 h60
RsleepZ-: Top Overlay "+" at 682.61,1003.57 h60
TR_5V: Top Overlay "+Vout" at 1243,2502 h60 r180; Top Overlay "-Vout" at 1243,1877 h60 r180; Top Overlay "+Vin" at 1763,2312 h60 r180; Top Overlay "-Vin" at 1763,2102 h60 r180; Top Overlay "THN20" at 1893,2627 h60 r180; Top Overlay "ON/OFF" at 1743,1802 h60 r180; Top Overlay "trim" at 1343,2202 h60 r180